# EAGLE board MasterModulePCB (EAGLE 9.7.0)
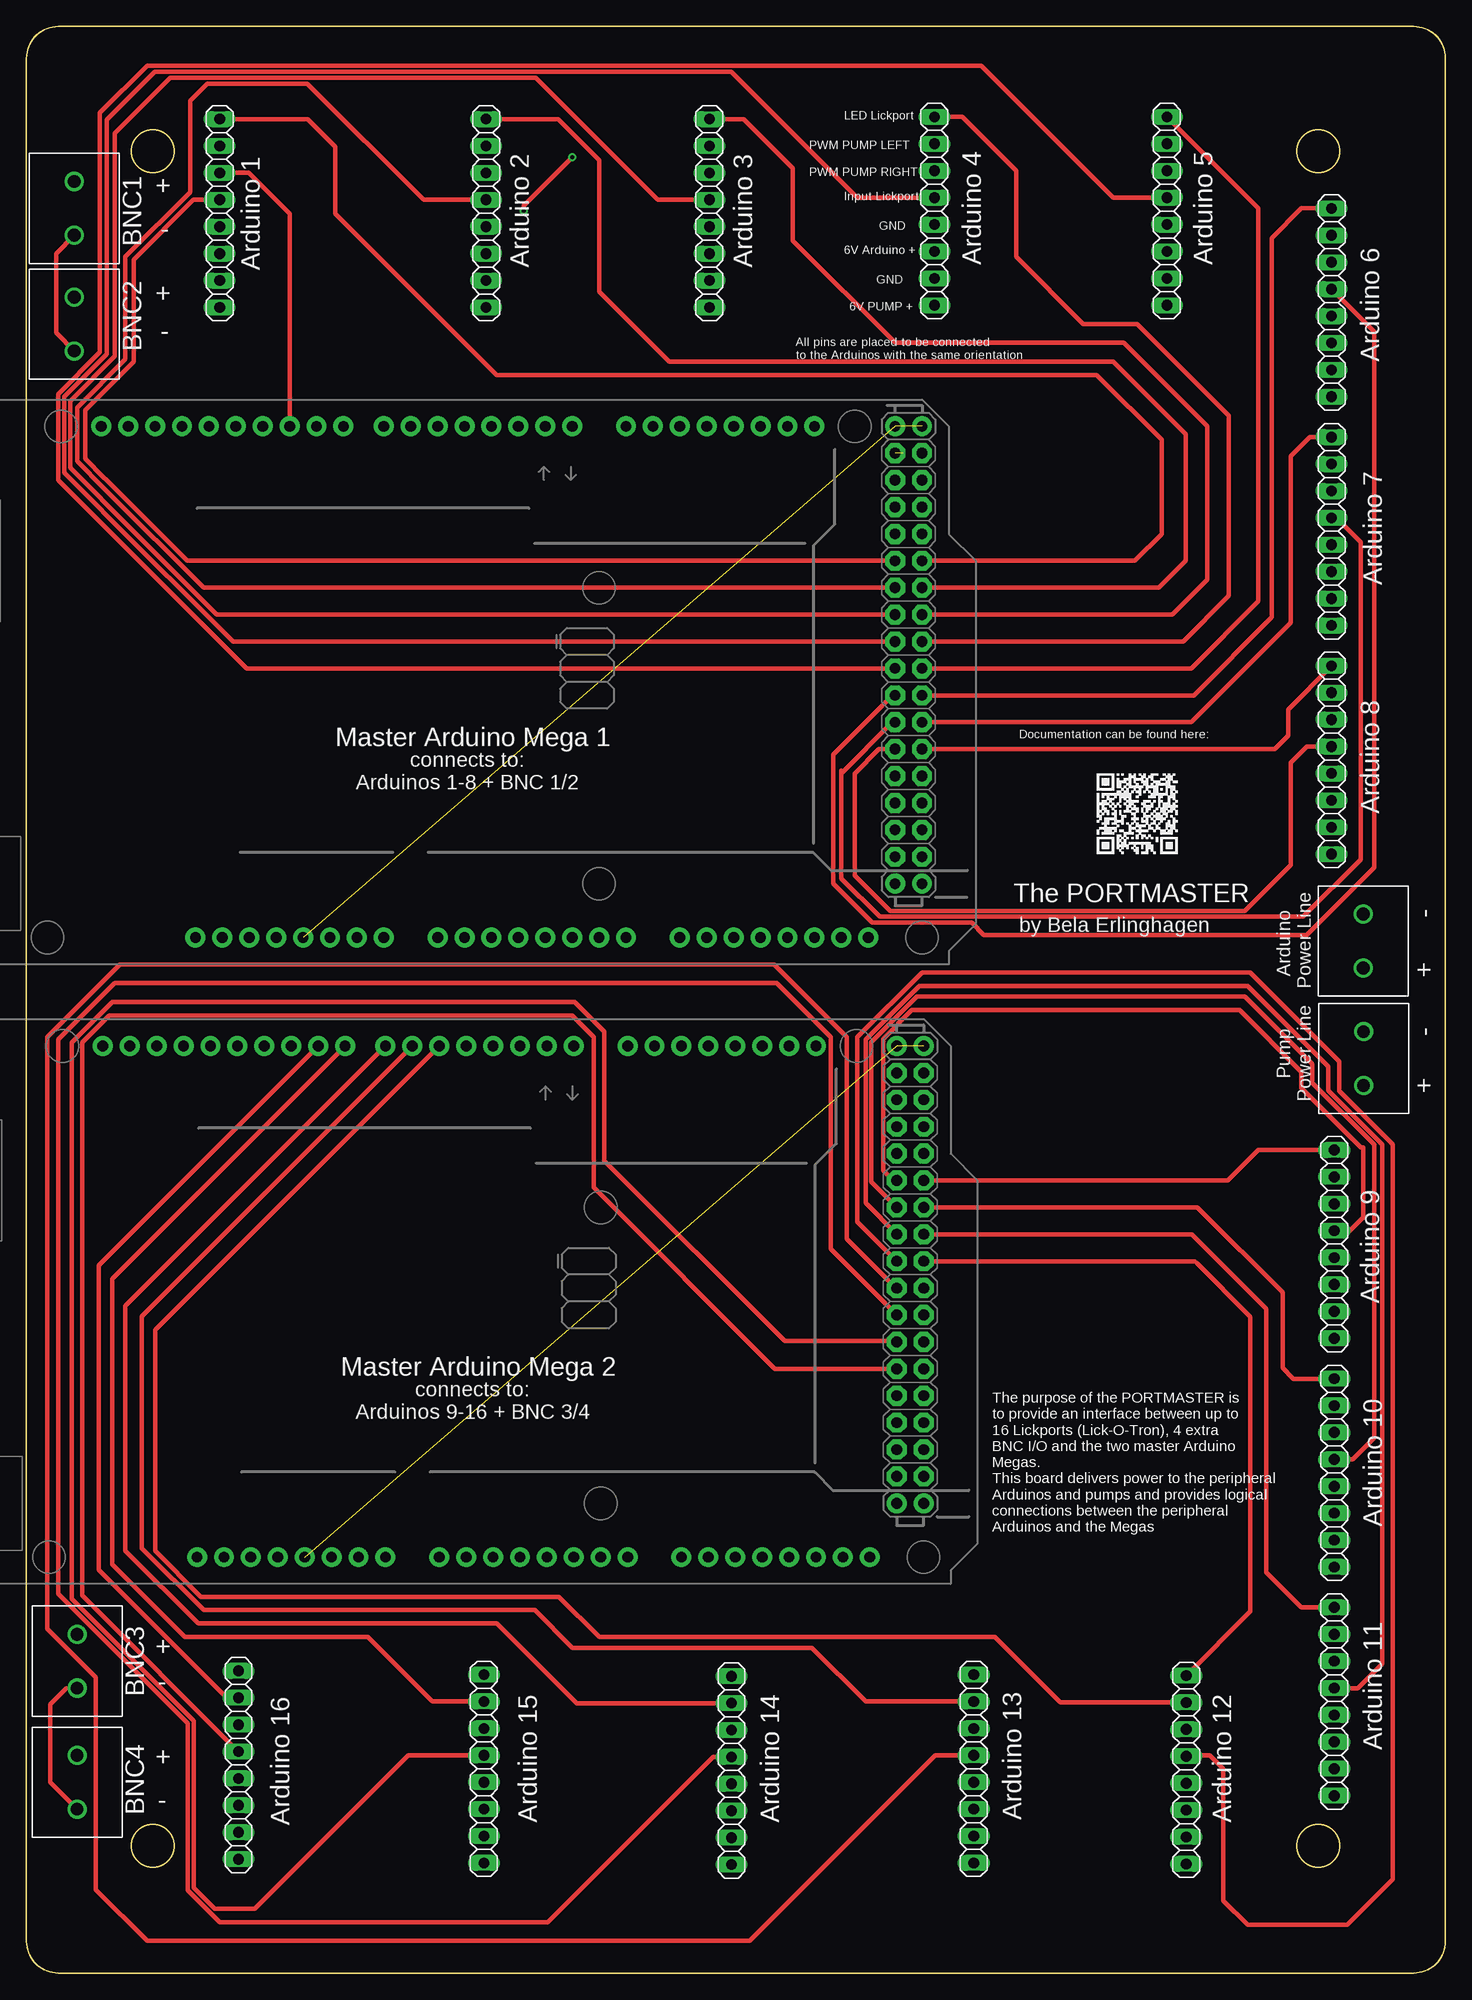
[diagram p0: board, top side]
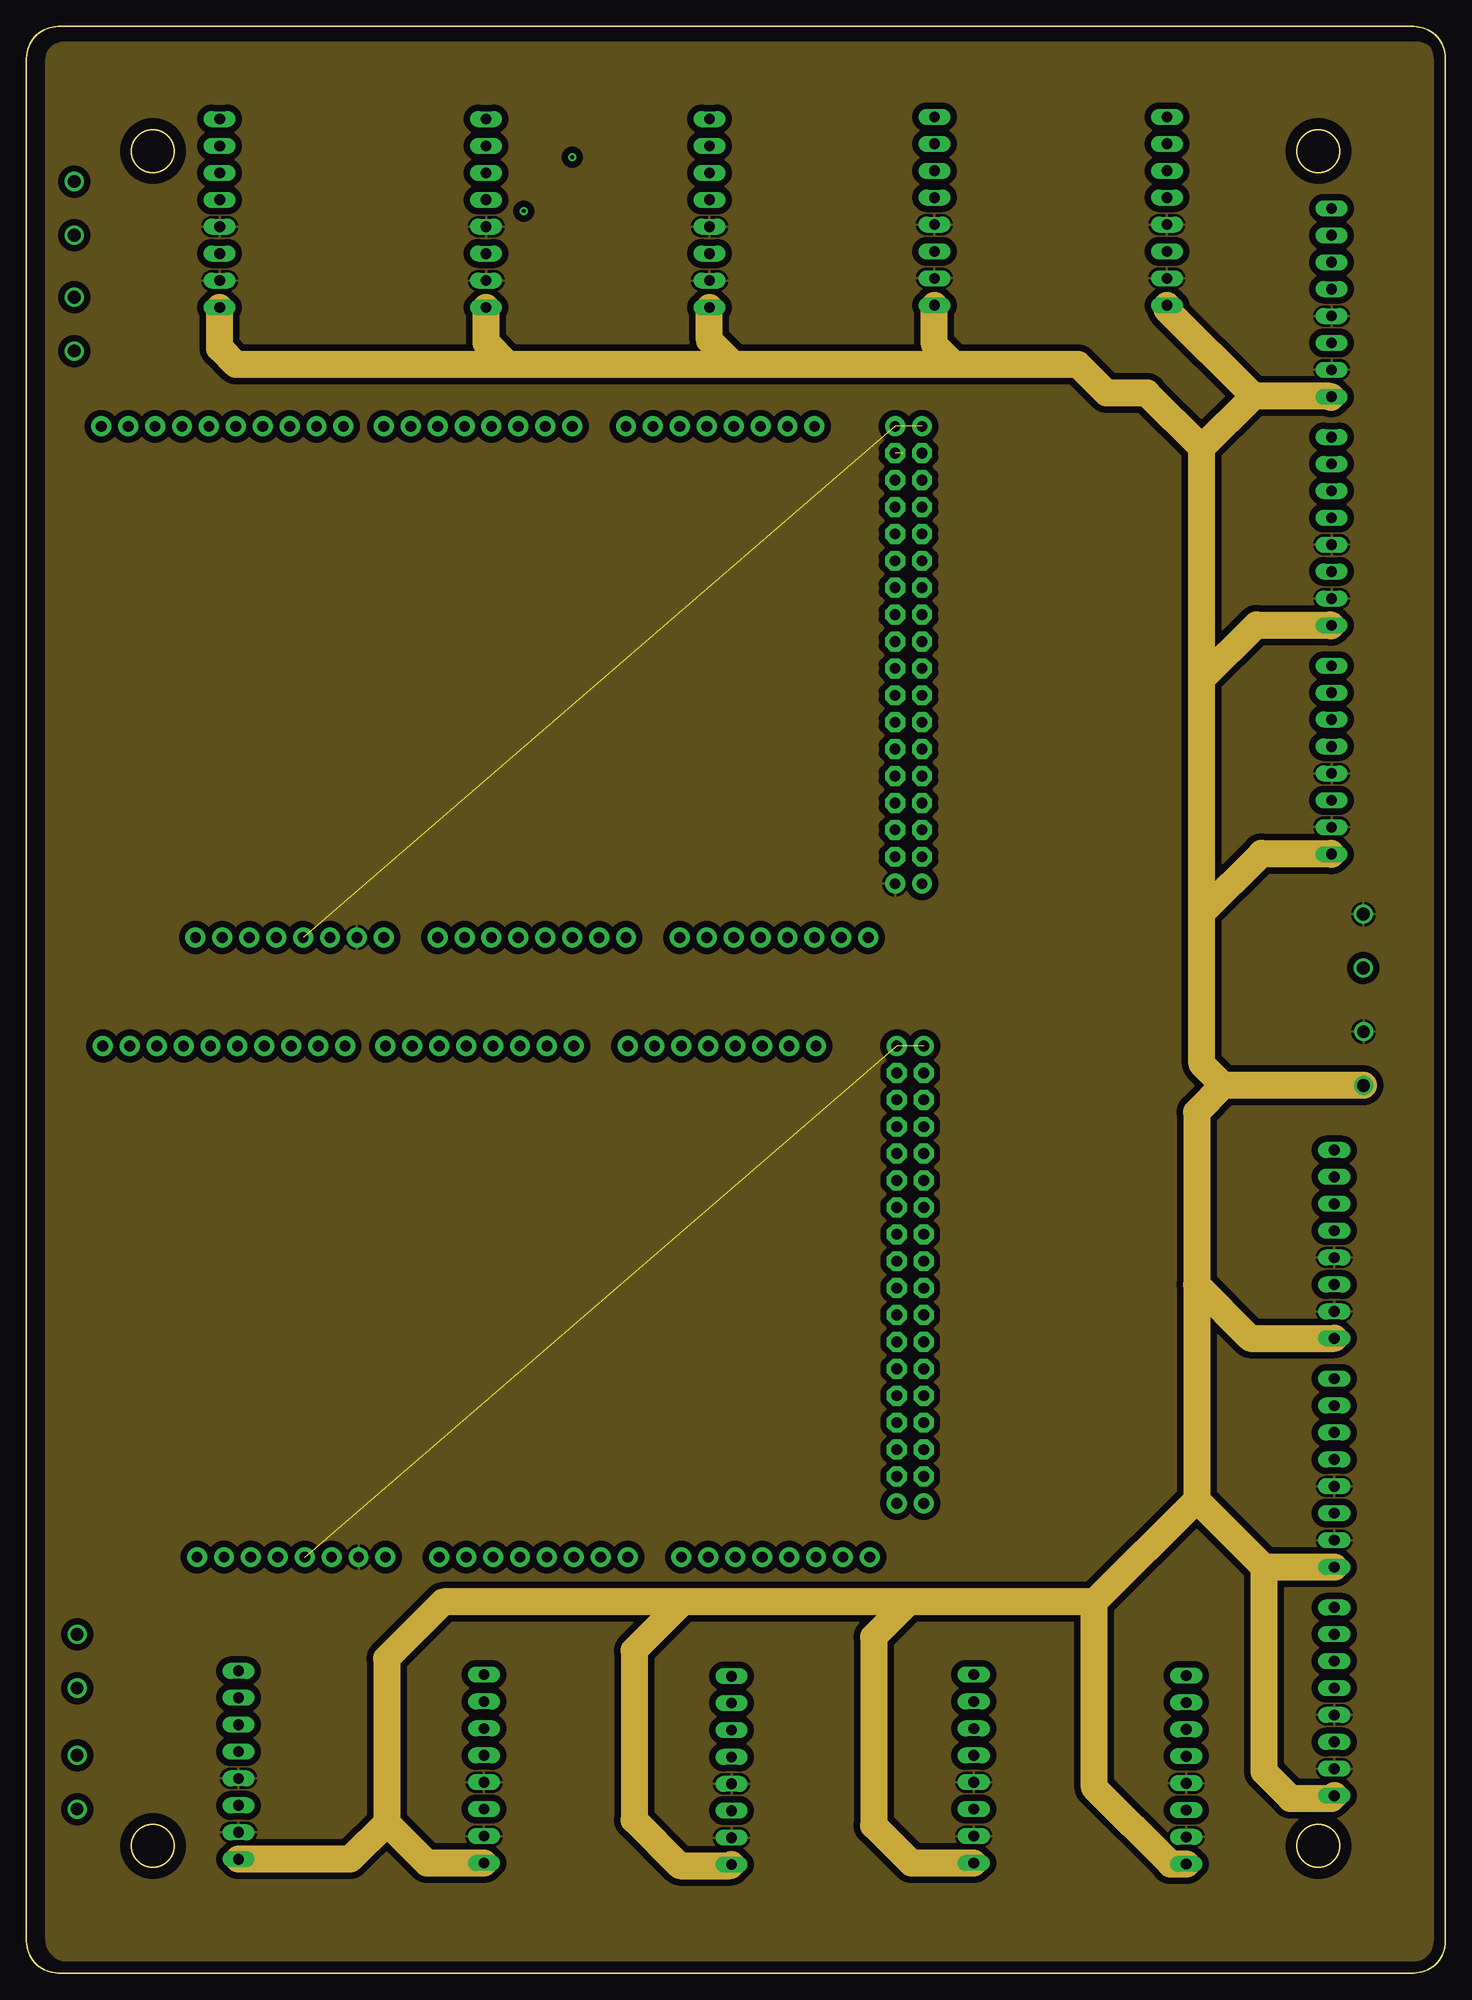
[diagram p1: board, inner layer Route2]
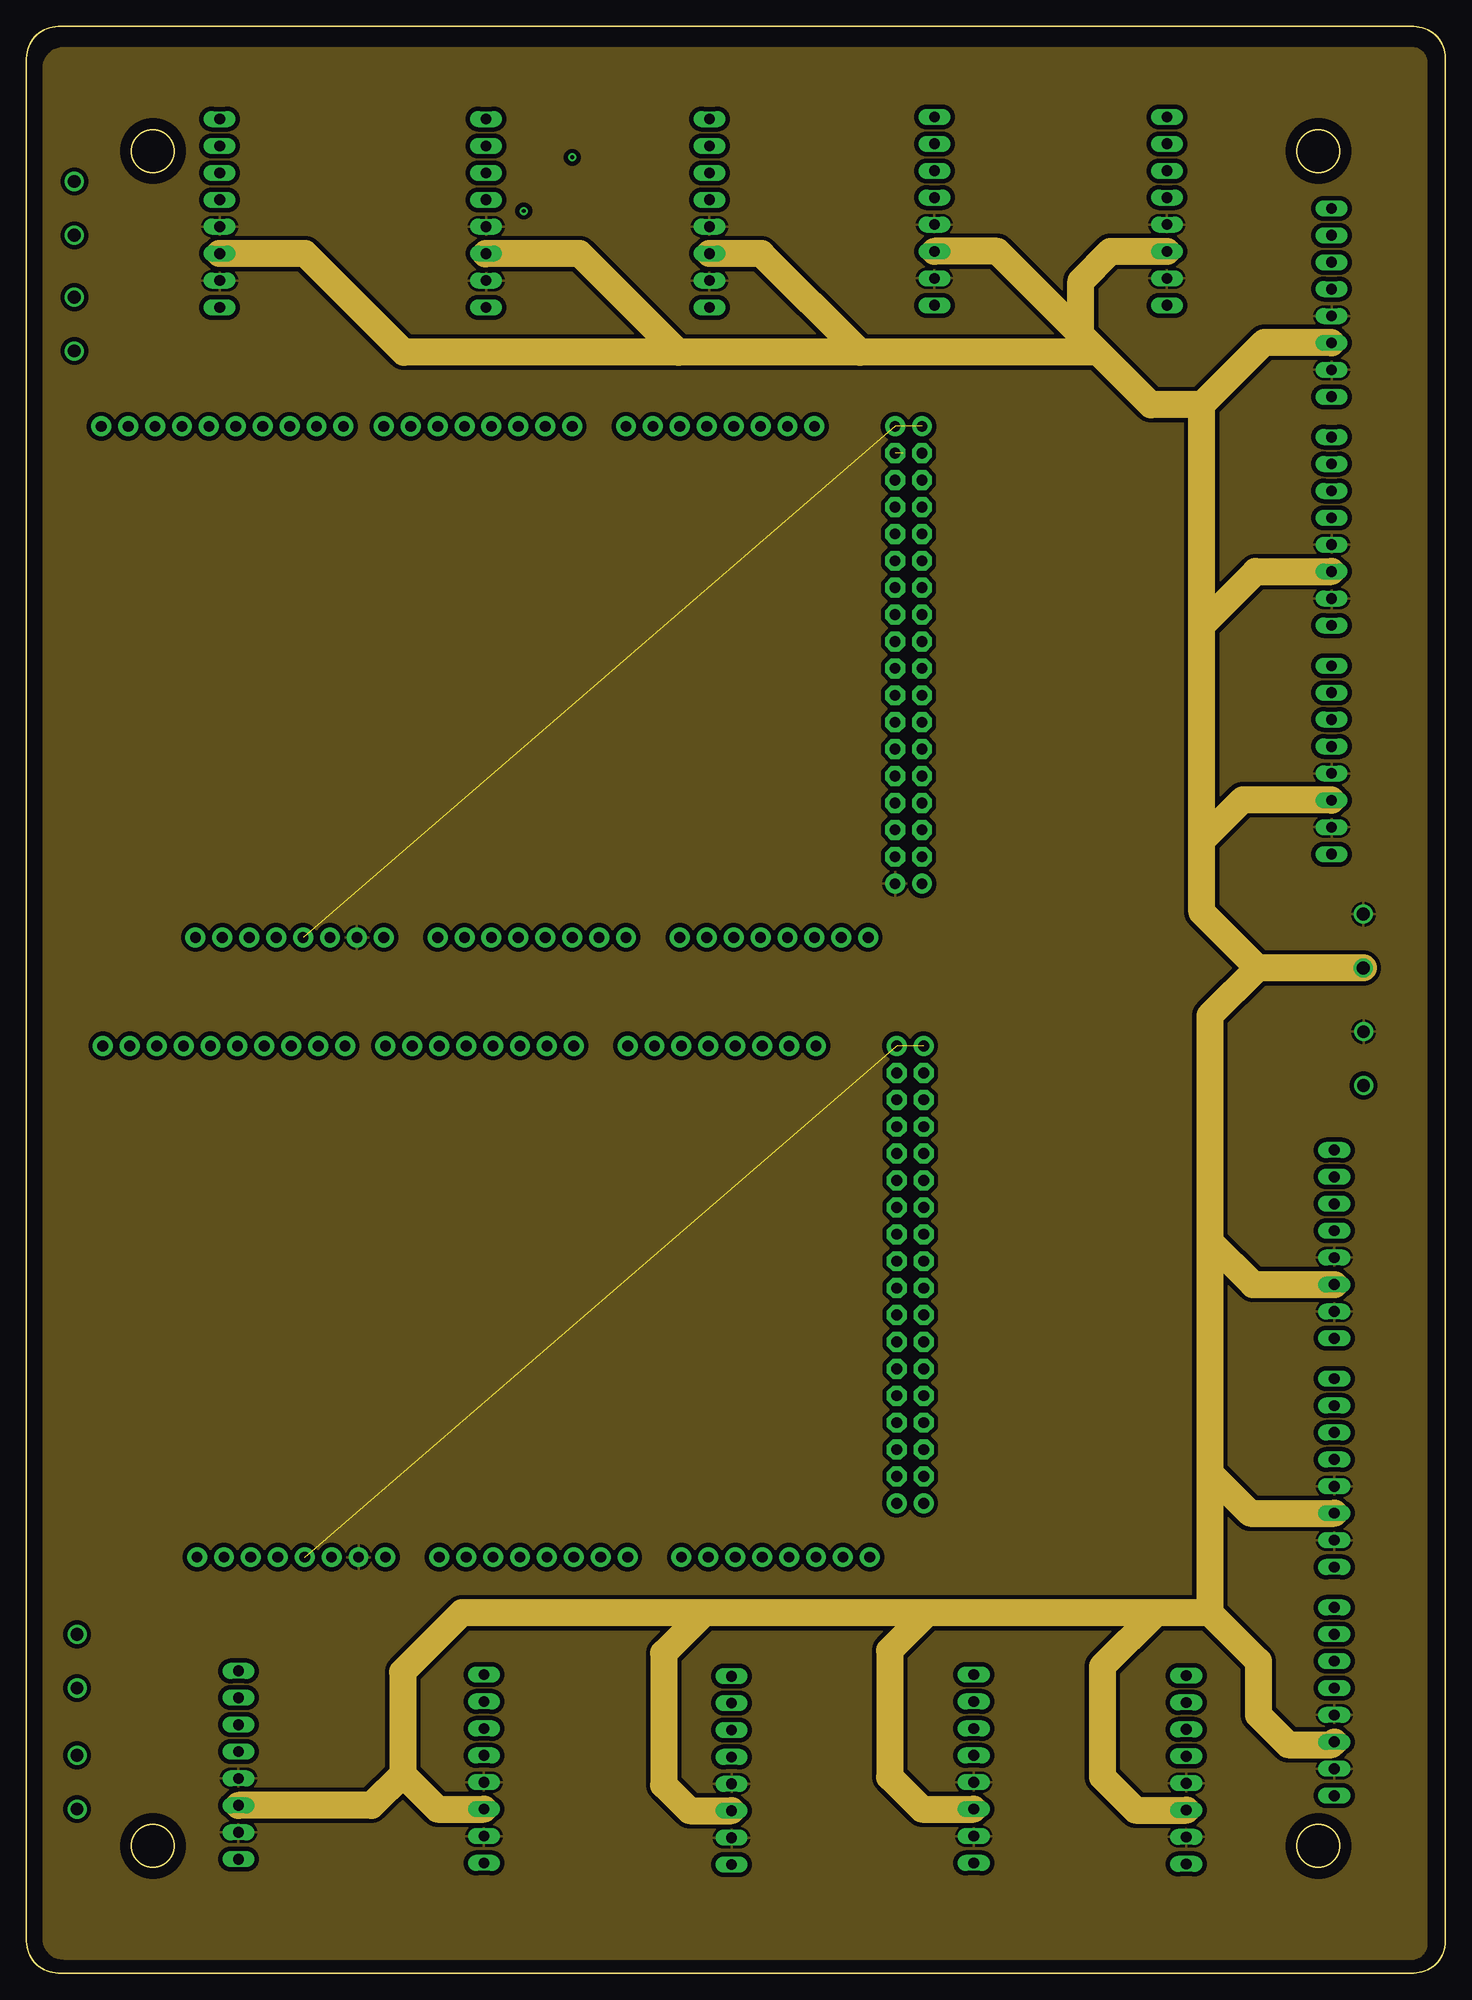
[diagram p2: board, inner layer Route15]
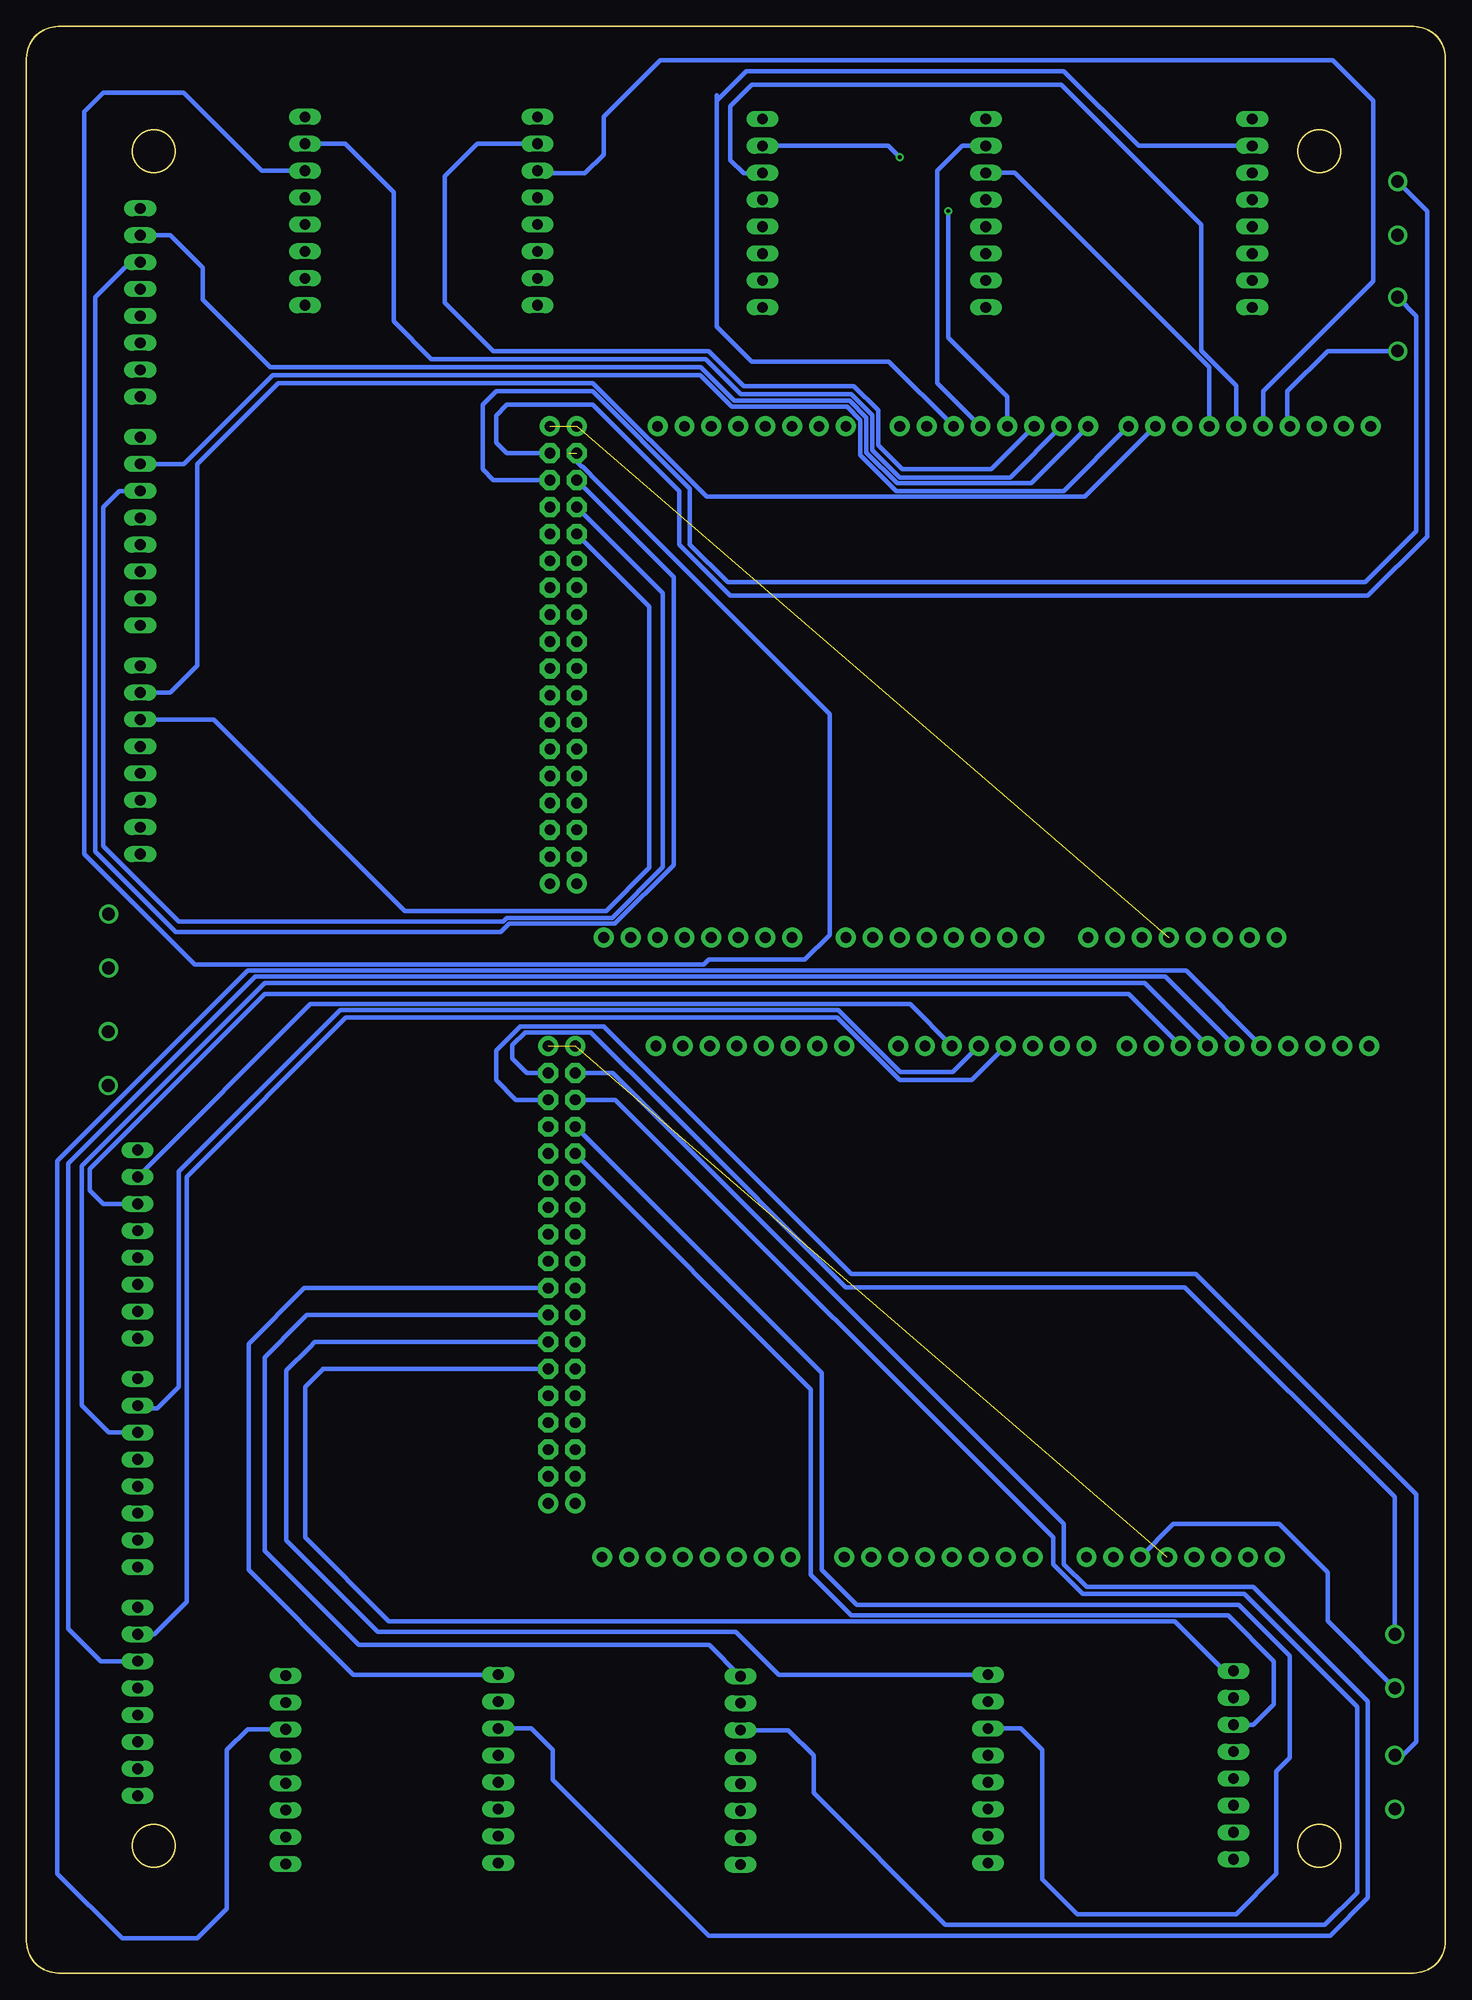
[diagram p3: board, bottom side, seen from below]

Size 133.93 x 183.77 mm. Coordinates in mm from the lower left corner, seen from the top.
Outline: 133.93,180.77 arc90 130.93,183.77 3,183.77 arc90 0,180.77 0,3 arc90 3,0 130.93,0 arc90 133.93,3 133.93,180.77
Outline: circle at 11.93,172 radius 2
Outline: circle at 121.93,12 radius 2
Outline: circle at 121.93,172 radius 2
Outline: circle at 11.93,12 radius 2
Copper layers (1+2*15+16): Top 0.035mm / dielectric 1.5mm / Route2 0.035mm / dielectric 0.15mm / Route15 0.035mm / dielectric 0.2mm / Bottom 0.035mm
Design rules "Fusion Electronics Design Rules *": minimum track width 6mil, minimum drill 0.35mm, track to track 6mil, track to pad 6mil, pad to pad 6mil, via to via 6mil, smd to smd 6mil, copper to edge 40mil, drill to drill 6mil, minimum pad ring 10mil, minimum via ring 8mil, stop-mask expansion 4mil, vias tented up to drill 9999mil, thermal gap 10mil

## Footprints (pad centres in the part's own frame; a part is rotated, then mirrored left to right if it is on the bottom)
ARDUINO_MEGA_NO_SILK = drill 1.016 pad 1.88: 0 13.97,24.13; 1 11.43,24.13; 2 8.89,24.13; 3 6.35,24.13; 3.3V -13.97,-24.13; 4 3.81,24.13; 5 1.27,24.13; 5V -11.43,-24.13; 5V@1 44.45,24.13; 5V@2 46.99,24.13; 6 -1.27,24.13; 7 -3.81,24.13; 8 -7.62,24.13; 9 -10.16,24.13; 10 -12.7,24.13; 11 -15.24,24.13; 12 -17.78,24.13; 13 -20.32,24.13; 14 19.05,24.13; 15 21.59,24.13; 16 24.13,24.13; 17 26.67,24.13; 18 29.21,24.13; 19 31.75,24.13; 20 34.29,24.13; 21 36.83,24.13; A0 1.27,-24.13; A1 3.81,-24.13; A2 6.35,-24.13; A3 8.89,-24.13; A4 11.43,-24.13; A5 13.97,-24.13; A6 16.51,-24.13; A7 19.05,-24.13; A8 24.13,-24.13; A9 26.67,-24.13; A10 29.21,-24.13; A11 31.75,-24.13; A12 34.29,-24.13; A13 36.83,-24.13; A14 39.37,-24.13; A15 41.91,-24.13; AREF -25.4,24.13; GND -8.89,-24.13; GND@1 -6.35,-24.13; GND@2 44.45,-19.05; GND@3 46.99,-19.05; GND@4 -22.86,24.13; IOREF -19.05,-24.13; NC -21.59,-24.13; RESET -16.51,-24.13; SCL -30.48,24.13; SDA -27.94,24.13; VIN -3.81,-24.13 | drill 1.016 pad 1.88 octagon: 22 44.45,21.59; 23 46.99,21.59; 24 44.45,19.05; 25 46.99,19.05; 26 44.45,16.51; 27 46.99,16.51; 28 44.45,13.97; 29 46.99,13.97; 30 44.45,11.43; 31 46.99,11.43; 32 44.45,8.89; 33 46.99,8.89; 34 44.45,6.35; 35 46.99,6.35; 36 44.45,3.81; 37 46.99,3.81; 38 44.45,1.27; 39 46.99,1.27; 40 44.45,-1.27; 41 46.99,-1.27; 42 44.45,-3.81; 43 46.99,-3.81; 44 44.45,-6.35; 45 46.99,-6.35; 46 44.45,-8.89; 47 46.99,-8.89; 48 44.45,-11.43; 49 46.99,-11.43; 50 44.45,-13.97; 51 46.99,-13.97; 52 44.45,-16.51; 53 46.99,-16.51
TERMBLK_508-2N = drill 1.2: 1 0,0; 2 5.08,0
1X08 = drill 1.016 long: 1 -8.89,0; 2 -6.35,0; 3 -3.81,0; 4 -1.27,0; 5 1.27,0; 6 3.81,0; 7 6.35,0; 8 8.89,0

## Placement (x,y rotation side)
B1  ARDUINO_MEGA_R3FULL  [ARDUINO_MEGA_NO_SILK]  37.54,121.9 0 top
B2  ARDUINO_MEGA_R3FULL  [ARDUINO_MEGA_NO_SILK]  37.69,63.39 0 top
J1  TERM-BLK-2P  [TERMBLK_508-2N]  126.21,88.88 270 top
J2  TERM-BLK-2P  [TERMBLK_508-2N]  126.18,99.97 270 top
J3  TERM-BLK-2P  [TERMBLK_508-2N]  4.77,15.47 90 top
J4  TERM-BLK-2P  [TERMBLK_508-2N]  4.77,26.9 90 top
J5  TERM-BLK-2P  [TERMBLK_508-2N]  4.52,153.14 90 top
J6  TERM-BLK-2P  [TERMBLK_508-2N]  4.52,164.06 90 top
JP1  PINHD-1X8  [1X08]  18.23,166.14 270 top
JP2  PINHD-1X8  [1X08]  43.38,166.14 270 top
JP3  PINHD-1X8  [1X08]  64.46,166.14 270 top
JP4  PINHD-1X8  [1X08]  85.7,166.35 270 top
JP5  PINHD-1X8  [1X08]  107.64,166.35 270 top
JP6  PINHD-1X8  [1X08]  123.19,157.71 270 top
JP7  PINHD-1X8  [1X08]  123.19,136.12 270 top
JP8  PINHD-1X8  [1X08]  123.19,114.53 270 top
JP9  PINHD-1X8  [1X08]  123.44,68.81 90 top
JP12  PINHD-1X8  [1X08]  123.44,47.22 90 top
JP13  PINHD-1X8  [1X08]  123.44,25.63 90 top
JP14  PINHD-1X8  [1X08]  109.47,19.19 90 top
JP15  PINHD-1X8  [1X08]  89.41,19.28 90 top
JP16  PINHD-1X8  [1X08]  66.55,19.13 90 top
JP17  PINHD-1X8  [1X08]  43.18,19.28 90 top
JP18  PINHD-1X8  [1X08]  20.01,19.63 90 top

## Library data of the parts
B1 B2 = MasterModuleLibrary
J1-J6 = MasterModuleLibrary; CATEGORY: Fixed Terminal Blocks; DESCRIPTION: Fixed Terminal Blocks 5.08MM PCB MOUNT 2P; MANUFACTURER: TE Connectivity AMP Connectors; MPN: 282837-2; OPERATING_TEMPERATURE: -40°C to +105°C; PART_STATUS: ACTIVE; PITCH: 0.200" (5.08mm); ROHS_COMPLIANCE: RoHS Compliant; SERIES: Buchanan; SUBCATEGORY: Terminal Blocks; TYPE: Through Hole; Screw - Rising Cage Clamp; Side wire entry, Horizontal with Board
JP1-JP9 JP12-JP18 = MasterModuleLibrary; CATEGORY: Headers; DESCRIPTION: Header, Straight, 8 Position; MANUFACTURER: Generic; MPN: Generic; OPERATING_TEMPERATURE: Generic; PART_STATUS: Active; PITCH: 0.100" (2.54mm); ROHS_COMPLIANCE: Generic; SERIES: Generic; SUB-CATEGORY: Headers, Male Pins; TYPE: Board to Board or Cable, Unshrouded, Through Hole, Straight

## Nets
6V+: J1.2 JP1.8 JP2.8 JP3.8 JP4.8 JP5.8 JP6.8 JP7.8 JP8.8 JP9.1 JP12.1 JP13.1 JP14.1 JP15.1 JP16.1 JP17.1 JP18.1
6VARDUINO: J2.2 JP1.6 JP2.6 JP3.6 JP4.6 JP5.6 JP6.6 JP7.6 JP8.6 JP9.3 JP12.3 JP13.3 JP14.3 JP15.3 JP16.3 JP17.3 JP18.3
BNC1: B1.23 J6.2
BNC2: B1.25 J5.2
BNC3: B2.23 J4.2
BNC4: B2.25 J3.2
GNDBNCA1: B1.GND B1.GND@3 B1.GND@4 J5.1 J6.1
GNDBNCA2: B2.GND B2.GND@3 B2.GND@4 J3.1 J4.1
GNDEXT: B1.GND@1 B1.GND@2 B2.GND@1 J1.1 J2.1 JP1.5 JP1.7 JP2.5 JP2.7 JP3.5 JP3.7 JP4.5 JP4.7 JP5.5 JP5.7 JP6.5 JP6.7 JP7.5 JP7.7 JP8.5 JP8.7 JP9.2 JP9.4 JP12.2 JP12.4 JP13.2 JP13.4 JP14.2 JP14.4 JP15.2 JP15.4 JP16.2 JP16.4 JP17.2 JP17.4 JP18.2 JP18.4
INPUTLP1: B1.30 JP1.4
INPUTLP2: B1.32 JP2.4
INPUTLP3: B1.34 JP3.4
INPUTLP4: B1.36 JP4.4
INPUTLP5: B1.38 JP5.4
INPUTLP6: B1.40 JP6.4
INPUTLP7: B1.42 JP7.4
INPUTLP8: B1.44 JP8.4
INPUTLP9: B2.30 JP9.5
INPUTLP10: B2.32 JP12.5
INPUTLP11: B2.34 JP13.5
INPUTLP12: B2.36 JP14.5
INPUTLP13: B2.38 JP15.5
INPUTLP14: B2.40 JP16.5
INPUTLP15: B2.42 JP17.5
INPUTLP16: B2.44 JP18.5
LED1: B1.31 JP1.1
LED2: B1.33 JP2.1
LED3: B1.35 JP3.1
LED4: B1.37 JP4.1
LED5: B1.39 JP5.1
LED6: B1.41 JP6.1
LED7: B1.43 JP7.1
LED8: B1.45 JP8.1
LED9: B2.31 JP9.8
LED10: B2.33 JP12.8
LED11: B2.35 JP13.8
LED12: B2.37 JP14.8
LED13: B2.39 JP15.8
LED14: B2.41 JP16.8
LED15: B2.43 JP17.8
LED16: B2.45 JP18.8
N$1: B2.IOREF
N$2: B2.RESET
N$3: B2.3.3V
N$4: B2.5V B2.5V@1 B2.5V@2
N$7: B2.VIN
N$8: B2.A0
N$9: B2.A1
N$10: B1.IOREF
N$11: B2.A2
N$12: B2.A3
N$13: B2.A4
N$14: B2.A5
N$15: B2.A6
N$16: B2.A7
N$17: B2.A8
N$18: B1.RESET
N$19: B2.A9
N$20: B2.A10
N$21: B2.A11
N$22: B2.A12
N$23: B2.A13
N$24: B2.A14
N$25: B2.A15
N$26: B1.3.3V
N$29: B2.27
N$30: B2.29
N$35: B1.5V B1.5V@1 B1.5V@2
N$40: B2.47
N$41: B2.49
N$42: B2.51
N$43: B2.53
N$44: B2.52
N$45: B2.50
N$46: B2.48
N$47: B2.46
N$59: B1.VIN
N$62: B2.21
N$63: B2.20
N$64: B2.19
N$65: B2.18
N$66: B2.17
N$67: B1.A0
N$68: B1.A1
N$69: B1.A2
N$70: B1.A3
N$71: B1.A4
N$72: B1.A5
N$73: B1.A6
N$74: B1.A7
N$75: B1.A8
N$76: B1.A9
N$77: B1.A10
N$78: B1.A11
N$79: B1.A12
N$80: B1.A13
N$81: B1.A14
N$82: B1.A15
N$85: B1.27
N$86: B1.29
N$95: B1.47
N$96: B1.49
N$97: B1.51
N$98: B1.53
N$99: B1.SCL
N$100: B1.SDA
N$101: B1.AREF
N$102: B2.16
N$103: B2.15
N$104: B2.14
N$105: B2.0
N$106: B2.1
N$114: B1.1
N$115: B1.0
N$116: B1.14
N$117: B1.15
N$118: B1.16
N$119: B1.17
N$120: B1.18
N$121: B1.19
N$122: B1.20
N$123: B1.21
N$136: B1.46
N$137: B1.48
N$138: B1.50
N$139: B1.52
N$145: B2.GND@2
N$146: B2.AREF
N$147: B2.SDA
N$148: B2.SCL
PWMLEFT1: B1.2 JP1.2
PWMLEFT2: B1.3 JP2.2
PWMLEFT3: B1.4 JP3.2
PWMLEFT4: B1.5 JP4.2
PWMLEFT5: B1.6 JP5.2
PWMLEFT6: B1.7 JP6.2
PWMLEFT7: B1.8 JP7.2
PWMLEFT8: B1.9 JP8.2
PWMLEFT9: B2.2 JP9.7
PWMLEFT10: B2.3 JP12.7
PWMLEFT11: B2.4 JP13.7
PWMLEFT12: B2.5 JP14.7
PWMLEFT13: B2.6 JP15.7
PWMLEFT14: B2.7 JP16.7
PWMLEFT15: B2.8 JP17.7
PWMLEFT16: B2.9 JP18.7
PWMRIGHT1: B1.10 JP1.3
PWMRIGHT2: B1.11 JP2.3
PWMRIGHT3: B1.12 JP3.3
PWMRIGHT4: B1.13 JP4.3
PWMRIGHT5: B1.22 JP5.3
PWMRIGHT6: B1.24 JP6.3
PWMRIGHT7: B1.26 JP7.3
PWMRIGHT8: B1.28 JP8.3
PWMRIGHT9: B2.10 JP9.6
PWMRIGHT10: B2.11 JP12.6
PWMRIGHT11: B2.12 JP13.6
PWMRIGHT12: B2.13 JP14.6
PWMRIGHT13: B2.22 JP15.6
PWMRIGHT14: B2.24 JP16.6
PWMRIGHT15: B2.26 JP17.6
PWMRIGHT16: B2.28 JP18.6

## Tracks (layer width: path | path; a pad name or v marks a point on that pad's centre or on a via)
6V+
  Route2 2.54: J1.2 112.98,83.8 | 112.98,83.8 110.94,85.83 110.94,100.05 | 110.94,100.05 116.58,105.69 123.14,105.69 JP8.8 | 110.94,100.05 110.94,122.15 | 110.94,122.15 116.08,127.28 123.03,127.28 123.14,127.18 JP7.8 | 110.94,122.15 110.94,143.99 | 110.94,143.99 115.82,148.87 | 110.94,143.99 105.76,149.18 101.95,149.18 99.26,151.87 87.58,151.87 | 87.58,151.87 85.7,153.75 JP4.8 | 87.58,151.87 66.75,151.87 | 66.75,151.87 64.46,154.15 JP3.8 | JP6.8 123.14,148.77 123.03,148.87 115.82,148.87 | 66.75,151.87 45.41,151.87 | 45.41,151.87 43.38,153.9 JP2.8 | 45.41,151.87 19.76,151.87 18.23,153.39 JP1.8 | 112.98,83.8 110.44,81.26 110.44,65 | 110.44,65 115.52,59.92 JP9.1 | 110.44,65 110.44,44.68 | 116.79,38.33 110.44,44.68 | 116.79,38.33 JP12.1 | 116.79,38.33 116.79,19.03 119.33,16.49 123.19,16.49 JP13.1 | 110.44,44.68 100.78,35.03 | 100.78,35.03 100.78,17.5 107.99,10.3 JP14.1 | 100.78,35.03 83.26,35.03 | 83.26,35.03 79.96,31.73 79.96,13.95 83.51,10.39 JP15.1 | 83.26,35.03 61.92,35.03 | 61.92,35.03 57.35,30.46 57.35,14.45 61.67,10.14 66.45,10.14 JP16.1 | 61.92,35.03 39.32,35.03 33.98,29.69 33.98,14.2 | 33.98,14.2 37.79,10.39 JP17.1 | 33.98,14.2 30.53,10.74 JP18.1 | 115.82,148.87 107.64,157.05 JP5.8
6VARDUINO
  Route15 2.54: J2.2 116.2,94.89 | 116.2,94.89 111.71,90.4 111.71,69.06 | 111.71,69.06 115.77,65 JP9.3 | 111.71,69.06 111.71,47.22 | 111.71,47.22 115.52,43.41 JP12.3 | 111.71,47.22 111.71,34.01 | 111.71,34.01 116.28,29.44 116.28,24.36 119.07,21.57 123.19,21.57 JP13.3 | 116.2,94.89 110.94,100.15 110.94,106.91 | 110.94,106.91 114.81,110.77 123.14,110.77 JP8.6 | 111.71,34.01 106.63,34.01 | 106.63,34.01 101.55,28.93 101.55,18.52 104.68,15.38 JP14.3 | 106.63,34.01 85.04,34.01 | 85.04,34.01 81.48,30.46 81.48,18.52 84.53,15.47 JP15.3 | 85.04,34.01 63.95,34.01 | 63.95,34.01 60.14,30.2 60.14,17.76 62.58,15.32 JP16.3 | 63.95,34.01 41.09,34.01 35.51,28.42 35.51,18.77 | 35.51,18.77 38.81,15.47 JP17.3 | 35.51,18.77 32.56,15.82 JP18.3 | 110.94,106.91 110.94,127.23 | 110.94,127.23 116.02,132.31 JP7.6 | 43.33,162.28 JP2.6 52.22,162.33 61.54,153.01 | 110.94,127.23 110.94,148.06 | 110.94,148.06 116.84,153.95 123.14,153.95 JP6.6 | 110.94,148.06 106.12,148.06 101.16,153.01 | 99.51,154.66 101.16,153.01 | 99.51,154.66 99.51,159.74 102.31,162.54 JP5.6 | 99.51,154.66 91.64,162.54 JP4.6 | 101.16,153.01 78.69,153.01 | 78.69,153.01 61.54,153.01 | 61.54,153.01 35.63,153.01 26.31,162.33 JP1.6 | 78.69,153.01 69.36,162.33 JP3.6
BNC1
  Bottom 0.406: J6.2 1.72,166.35 1.72,135.61 7.31,130.02 67.51,130.02 72.34,134.85 72.34,139.93 80.46,148.06 88.59,148.06 89.61,147.04 89.61,144.5 88.59,143.49 B1.23
BNC2
  Bottom 0.406: J5.2 2.74,156.44 2.74,136.12 7.57,131.29 67.76,131.29 71.32,134.85 71.32,140.16 80.49,149.33 89.61,149.33 90.88,148.06 90.88,141.96 89.86,140.95 B1.25
BNC3
  Bottom 0.406: J4.2 4.77,44.93 24.58,64.75 56.08,64.75 56.59,64.75 73.1,81.26 73.35,81.51 80.66,88.82 86.87,88.82 88.08,87.61 88.08,86.34 86.73,84.98 B2.23
BNC4
  Bottom 0.406: J3.2 4.01,20.55 2.74,21.82 2.74,45.19 23.57,66.02 56.08,66.02 79.45,89.38 87.32,89.38 89.61,87.1 89.61,84.3 87.75,82.44 B2.25
GNDBNCA1
  Top 0.406: J5.1 2.79,154.87 2.79,162.33 J6.1
  Bottom 0.406: J5.1 11.12,153.14 14.93,149.33 14.93,146.28 B1.GND@4
GNDBNCA2
  Top 0.406: J3.1 2.23,18.01 2.23,25.38 3.76,26.9 J4.1
  Bottom 0.406: J4.1 11.12,33.25 11.12,37.82 15.69,42.39 25.67,42.39 B2.GND
GNDEXT
  pour Route15 (isolate 0.406): 3.51,1.35 130.75,1.35 131,1.37 131.24,1.43 131.47,1.54 131.67,1.68 131.84,1.86 131.99,2.06 132.09,2.28 132.16,2.52 132.18,2.77 132.18,180.31 132.16,180.56 132.09,180.8 131.99,181.03 131.84,181.23 131.67,181.41 131.47,181.55 131.24,181.65 131,181.72 130.75,181.74 3.51,181.74 3.2,181.71 2.9,181.64 2.62,181.53 2.37,181.37 2.14,181.17 1.94,180.94 1.78,180.68 1.67,180.4 1.59,180.11 1.57,179.8 1.57,3.28 1.59,2.98 1.67,2.68 1.78,2.4 1.94,2.14 2.14,1.91 2.37,1.72 2.62,1.56 2.9,1.44 3.2,1.37
  pour Route2 (isolate 0.61): 1.85,180.83 1.82,180.57 1.82,3.28 1.85,2.94 1.93,2.6 2.06,2.29 2.24,1.99 2.46,1.73 2.73,1.51 3.02,1.33 3.33,1.2 3.67,1.12 4.01,1.09 130.75,1.09 131.1,1.12 131.43,1.2 131.75,1.33 132.04,1.51 132.3,1.73 132.52,1.99 132.7,2.29 132.83,2.6 132.91,2.94 132.94,3.28 132.94,180.57 132.92,180.83 132.86,181.09 132.76,181.33 132.62,181.56 132.45,181.76 132.25,181.93 132.02,182.06 131.78,182.16 131.53,182.23 131.26,182.25 3.51,182.25 3.24,182.23 2.98,182.16 2.74,182.06 2.52,181.93 2.32,181.76 2.15,181.56 2.01,181.33 1.91,181.09
INPUTLP1
  Top 0.406: JP1.4 15.75,167.41 10.11,161.77 10.11,152.12 5.53,147.55 5.53,142.98 7.31,141.2 7.57,140.95 15.19,133.33 B1.30
INPUTLP2
  Top 0.406: JP2.4 37.49,167.41 26.51,178.39 17.07,178.39 15.44,176.76 15.44,168.12 9.34,162.03 9.34,152.38 4.77,147.8 4.77,142.72 7.31,140.18 7.57,139.93 16.71,130.79 B1.32
INPUTLP3
  Top 0.406: JP3.4 59.58,167.41 48.05,178.94 13.56,178.94 8.33,173.71 8.33,152.63 4.11,148.41 4.11,142.11 6.8,139.42 7.31,138.91 17.98,128.25 B1.34
INPUTLP4
  Top 0.406: JP4.4 78.43,167.62 66.54,179.5 12.09,179.5 7.57,174.98 7.57,152.86 3.55,148.84 3.55,141.66 7.06,138.15 7.31,137.9 19.5,125.71 B1.36
INPUTLP5
  Top 0.406: JP5.4 102.56,167.62 90.12,180.06 11.38,180.06 6.93,175.62 6.93,153.01 2.99,149.07 2.99,140.95 20.77,123.17 B1.38
INPUTLP6
  Top 0.406: JP6.4 127.2,154.97 127.2,104.37 120.85,98.02 90.37,98.02 89.23,99.16 79.83,99.16 76.15,102.85 76.15,115.04 80.97,119.86 81.73,120.63 B1.40
INPUTLP7
  Top 0.406: JP7.4 123.64,137.39 125.93,135.1 125.93,105.13 120.52,99.72 80.54,99.72 76.91,103.35 76.91,113.26 | 76.91,113.26 76.91,113.51 | 76.91,113.26 81.73,118.09 B1.42
INPUTLP8
  Top 0.406: JP8.4 120.85,115.8 119.33,114.28 119.33,104.62 114.98,100.28 81.5,100.28 78.18,103.61 78.18,113.26 80.46,115.55 B1.44
INPUTLP9
  Top 0.406: JP9.5 124.91,70.08 126.18,71.35 126.18,77.95 125.93,77.95 120.34,83.54 120.34,85.07 114.5,90.91 83.57,90.91 80.84,88.18 80.84,75.78 81.97,74.65 B2.30
INPUTLP10
  Top 0.406: JP12.5 125.17,48.49 127.2,50.52 127.2,78.21 121.36,84.05 121.36,85.83 115.01,92.18 84.05,92.18 79.75,87.88 79.75,74.67 B2.32
INPUTLP11
  Top 0.406: JP13.5 125.68,26.9 127.96,29.19 127.96,78.24 122.88,83.32 122.88,85.57 115.26,93.19 92.15,93.19 91.89,93.19 84.27,93.19 79.19,88.11 79.19,72.69 B2.34
INPUTLP12
  Top 0.406: JP14.5 109.56,20.55 111.71,20.55 112.98,19.28 112.98,6.83 115.26,4.55 124.66,4.55 128.98,8.87 128.98,78.21 123.9,83.29 123.9,86.05 115.49,94.46 84.53,94.46 78.43,88.37 78.43,70.91 B2.36
INPUTLP13
  Top 0.406: JP15.5 85.8,20.55 68.27,3.02 11.38,3.02 6.55,7.85 6.55,27.92 1.98,32.49 1.98,88.37 8.81,95.2 69.29,95.2 70.58,95.2 77.42,88.37 77.42,69.32 82.07,64.66 B2.38
INPUTLP14
  Top 0.406: JP16.5 64.82,20.4 49.22,4.8 18.23,4.8 15.23,7.81 15.23,23.56 2.99,35.79 2.99,88.11 8.33,93.45 70.81,93.45 75.89,88.37 75.89,68.37 B2.40
INPUTLP15
  Top 0.406: JP17.5 36.01,20.55 21.54,6.07 17.75,6.07 15.79,8.04 15.79,23.79 4.26,35.31 4.26,87.86 8.07,91.67 51.76,91.67 54.56,88.88 54.56,76.68 71.57,59.67 82.06,59.67 B2.42
INPUTLP16
  Top 0.406: JP18.5 5.28,35.64 5.28,87.86 7.82,90.4 51.51,90.4 53.54,88.37 53.54,74.14 70.64,57.04 B2.44
LED1
  Top 0.406: JP1.1 26.56,175.03 29.16,172.44 29.16,166.09 44.4,150.85 101.04,150.85 107.13,144.76 107.13,135.87 104.59,133.33 B1.31
LED2
  Top 0.406: JP2.1 50.19,175.03 54.05,171.17 54.05,158.73 60.65,152.12 102.56,152.12 109.42,145.26 109.42,133.33 106.88,130.79 B1.33
LED3
  Top 0.406: JP3.1 67.71,175.03 72.34,170.41 72.34,163.55 81.99,153.9 103.58,153.9 111.45,146.03 111.45,131.55 108.15,128.25 B1.35
LED4
  Top 0.406: JP4.1 88.34,175.24 93.42,170.16 93.42,162.03 99.77,155.68 104.85,155.68 113.48,147.04 113.48,130.02 109.17,125.71 B1.37
LED5
  Top 0.406: JP5.1 116.28,166.6 116.28,129.52 109.93,123.17 B1.39
LED6
  Top 0.406: JP6.1 120.34,166.6 117.55,163.81 117.55,127.99 110.18,120.63 B1.41
LED7
  Top 0.406: JP7.1 121.1,145.01 119.33,143.23 119.33,127.48 109.93,118.09 B1.43
LED8
  Top 0.406: JP8.1 119.07,119.3 119.07,116.82 117.8,115.55 B1.45
LED9
  Top 0.406: JP9.8 116.28,77.7 113.4,74.82 B2.31
LED10
  Top 0.406: JP12.8 119.58,56.11 118.56,57.13 118.56,64.24 110.69,72.11 110.52,72.28 B2.33
LED11
  Top 0.406: JP13.8 120.34,34.52 117.04,37.82 117.04,62.71 110.01,69.74 B2.35
LED12
  Top 0.406: JP14.8 115.52,34.12 115.52,61.95 110.44,67.03 110.26,67.2 B2.37
LED13
  Bottom 0.406: JP15.8 103.07,28.17 112.98,38.08 112.98,59.41 107.72,64.66 B2.39
LED14
  Bottom 0.406: JP16.8 69.49,30.96 102.56,30.96 111.45,39.85 111.45,58.14 108.02,61.57 107.47,62.12 B2.41
LED15
  Bottom 0.406: JP17.8 62.94,28.17 67,32.23 100.78,32.23 109.42,40.87 109.42,56.87 107.26,59.03 106.71,59.58 B2.43
LED16
  Bottom 0.406: JP18.8 20.11,28.42 20.77,28.42 25.55,33.2 99.72,33.2 107.64,41.12 107.64,55.35 105.99,57 105.95,57.04 B2.45
N$4  (2 unrouted)
N$35  (2 unrouted)
PWMLEFT1
  Top 0.406: 18.18,172.44 JP1.2
  Bottom 0.406: 68.78,176.76 68.78,155.42 65.48,152.12 52.52,152.12 B1.2 | 68.78,176.76 68.78,177.27 | 68.78,176.76 65.99,179.55 36.01,179.55 28.95,172.49 JP1.2
PWMLEFT2
  Top 0.406: 43.33,172.44 JP2.2
  Bottom 0.406: JP2.2 43.63,172.49 45.61,172.49 47.95,170.16 47.95,150.09 B1.3
PWMLEFT3  (via drill 0.35)
  Top 0.406: v51.51,171.43 46.94,166.85 v46.94,166.35
  Bottom 0.406: v51.51,171.43 52.58,172.49 JP3.2 | B1.4 41.35,148.82 46.94,154.41 v46.94,166.35
PWMLEFT4
  Bottom 0.406: JP4.2 91.39,172.7 94.43,169.65 94.43,157.71 89.86,153.14 69.54,153.14 66.24,149.84 55.83,149.84 53.54,147.55 53.54,144.25 51.25,141.96 42.87,141.96 B1.5
PWMLEFT5
  Bottom 0.406: JP5.2 103.83,172.7 99.26,168.12 99.26,155.93 95.7,152.38 69.8,152.38 66.49,149.07 56.08,149.07 54.1,147.09 54.1,143.79 51.51,141.2 41.09,141.2 B1.6
PWMLEFT6
  Bottom 0.406: JP6.2 120.34,164.06 117.29,161.01 117.29,157.96 110.94,151.61 70.3,151.61 67.13,148.44 56.23,148.44 54.66,146.86 54.66,143.56 51.74,140.64 39.11,140.64 B1.7
PWMLEFT7
  Bottom 0.406: JP7.2 119.07,142.47 110.69,150.85 70.33,150.85 67.36,147.88 56.47,147.88 55.22,146.63 55.22,143.33 51.82,139.93 36.01,139.93 B1.8
PWMLEFT8
  Bottom 0.406: JP8.2 120.34,120.88 117.8,123.42 117.8,142.47 110.18,150.09 80.46,150.09 69.74,139.37 34.03,139.37 B1.9
PWMLEFT9
  Bottom 0.406: JP9.7 107.13,91.47 59.64,91.47 59.16,91.47 50.52,91.47 B2.2
PWMLEFT10
  Bottom 0.406: JP12.7 123.19,53.32 121.61,53.32 119.58,55.35 119.58,75.67 104.34,90.91 57.32,90.91 51.48,85.07 46.5,85.07 B2.3
PWMLEFT11
  Bottom 0.406: 123.9,31.98 JP13.7 121.87,31.98 118.82,35.03 118.82,75.16 103.79,90.19 90.37,90.19 90.03,90.19 57.39,90.19 51.51,84.3 44.72,84.3 B2.4
PWMLEFT12
  Top 0.406: JP14.7 97.57,25.54 91.39,31.73 54.05,31.73 50.24,35.54 16.46,35.54 12.14,39.85 12.14,60.7 B2.5
PWMLEFT13
  Top 0.406: 90.12,25.63 JP15.7 79.19,25.63 74.11,30.71 51.51,30.71 47.95,34.27 16.71,34.27 10.87,40.11 10.87,61.97 B2.6
PWMLEFT14
  Top 0.406: JP16.7 51.92,25.48 44.4,33 23.06,33 22.81,33 16.2,33 9.34,39.85 9.34,62.99 B2.7
PWMLEFT15
  Top 0.406: JP17.7 38.3,25.63 32.2,31.73 19.76,31.73 14.93,31.73 8.07,38.58 8.07,65.53 B2.8
PWMLEFT16
  Top 0.406: JP18.7 18.9,25.98 17.09,27.79 15.95,28.93 6.8,38.08 6.8,66.8 B2.9
PWMRIGHT1
  Top 0.406: JP1.3 20.98,169.95 24.84,166.09 B1.10
PWMRIGHT2
  Bottom 0.406: JP2.3 40.64,169.95 22.3,151.61 B1.11
PWMRIGHT3
  Bottom 0.406: JP3.3 64.51,169.9 66.24,169.9 67.51,171.17 67.51,176.25 65.48,178.28 36.27,178.28 23.06,165.08 23.06,153.17 19.76,149.86 B1.12
PWMRIGHT4
  Bottom 0.406: JP4.3 85.44,169.9 81.23,169.9 79.45,171.68 79.45,175.24 74.11,180.57 10.61,180.57 6.8,176.76 6.8,159.74 12.14,154.41 12.39,154.15 17.22,149.33 B1.13
PWMRIGHT5  (1 unrouted)
  Bottom 0.406: JP5.3 111.71,170.16 119.07,177.52 126.69,177.52 128.47,175.74 128.47,105.64 118.03,95.2 70.02,95.2 69.54,95.68 60.45,95.68 58.11,98.02 58.11,118.85 80.69,141.43 80.69,141.48 81.45,142.24 81.5,142.24 82.75,143.49
PWMRIGHT6
  Bottom 0.406: JP6.3 124.15,161.52 127.45,158.22 127.45,105.89 119.83,98.27 89.15,98.27 88.37,99.06 78.41,99.06 72.84,104.62 72.84,131.8 B1.24
PWMRIGHT7
  Bottom 0.406: JP7.3 125.17,139.93 126.69,138.41 126.69,106.4 119.58,99.29 88.93,99.29 88.6,99.62 78.64,99.62 73.86,104.4 73.86,125.45 73.86,125.76 73.86,130.28 B1.26
PWMRIGHT8
  Bottom 0.406: JP8.3 116.28,118.34 98.22,100.28 97.96,100.28 97.74,100.28 79.22,100.28 75.13,104.37 75.13,129.01 B1.28
PWMRIGHT9
  Bottom 0.406: JP9.6 126.69,72.62 127.96,73.89 127.96,75.92 111.45,92.43 29.9,92.43 B2.10
PWMRIGHT10
  Bottom 0.406: JP12.6 126.18,51.03 128.72,53.57 128.72,76.18 111.45,93.45 37.79,93.45 37.01,93.45 28.37,93.45 B2.11
PWMRIGHT11
  Bottom 0.406: JP13.6 126.95,29.44 129.99,32.49 129.99,76.43 112.34,94.08 35.51,94.08 35.11,94.08 26.47,94.08 B2.12
PWMRIGHT12
  Bottom 0.406: JP14.6 113.07,23 115.01,21.06 115.01,6.07 117.8,3.28 124.91,3.28 131.01,9.37 131.01,76.68 113.05,94.64 34.24,94.64 33.12,94.64 24.49,94.64 B2.13
PWMRIGHT13
  Bottom 0.406: JP15.6 86.31,23.09 84.27,21.06 84.27,18.26 69.54,3.53 10.87,3.53 7.31,7.09 7.31,25.63 18.13,36.44 33.87,36.44 36.01,38.58 36.01,42.39 78.6,84.98 B2.22
PWMRIGHT14
  Bottom 0.406: JP16.6 62.02,22.94 59.64,20.55 59.64,16.99 47.19,4.55 11.38,4.55 8.33,7.6 8.33,25.12 19,35.79 33.22,35.79 34.24,35.79 37.03,38.58 37.03,41.12 78.35,82.44 B2.24
PWMRIGHT15
  Bottom 0.406: JP17.6 40.08,23.09 38.05,21.06 38.05,8.87 34.74,5.56 19.76,5.56 15.95,9.37 15.95,19.03 14.68,20.3 14.68,29.95 19.5,34.77 55.57,34.77 58.87,38.08 58.87,56.64 B2.26
PWMRIGHT16
  Bottom 0.406: JP18.6 18.13,23.44 16.2,25.38 16.2,29.44 20.52,33.76 56.08,33.76 59.89,37.57 59.89,55.11 B2.28

## Text on the board
tPlace: LED Lickport | PWM PUMP LEFT | PWM PUMP RIGHT | + | Input Lickport | GND | - | BNC1 | 6V Arduino + | Arduino 1 | Arduino 2 | Arduino 3 | Arduino 4 | Arduino 5 | GND | + | 6V PUMP + | - | BNC2 | All pins are placed to be connected / to the Arduinos with the same orientation | Arduino 6 | Arduino 7 | Documentation can be found here: | Master Arduino Mega 1 | connects to: / Arduinos 1-8 + BNC 1/2 | Arduino 8 | The PORTMASTER | - | by Bela Erlinghagen | Arduino / Power Line | + | - | Pump / Power Line | + | Arduino 9 | Master Arduino Mega 2 | connects to: / Arduinos 9-16 + BNC 3/4 | The purpose of the PORTMASTER is / to provide an interface between up to / 16 Lickports (Lick-O-Tron), 4 extra / BNC I/O and the two master Arduino / Megas. / This board delivers power to the peripheral / Arduinos and pumps and provides logical / connections between the peripheral / Arduinos and the Megas | Arduino 10 | + | - | BNC3 | Arduino 11 | + | BNC4 | - | Arduino 16 | Arduino 15 | Arduino 14 | Arduino 13 | Arduino 12